# EAGLE board LCDShieldC144MVGI v1 (EAGLE 5.11)
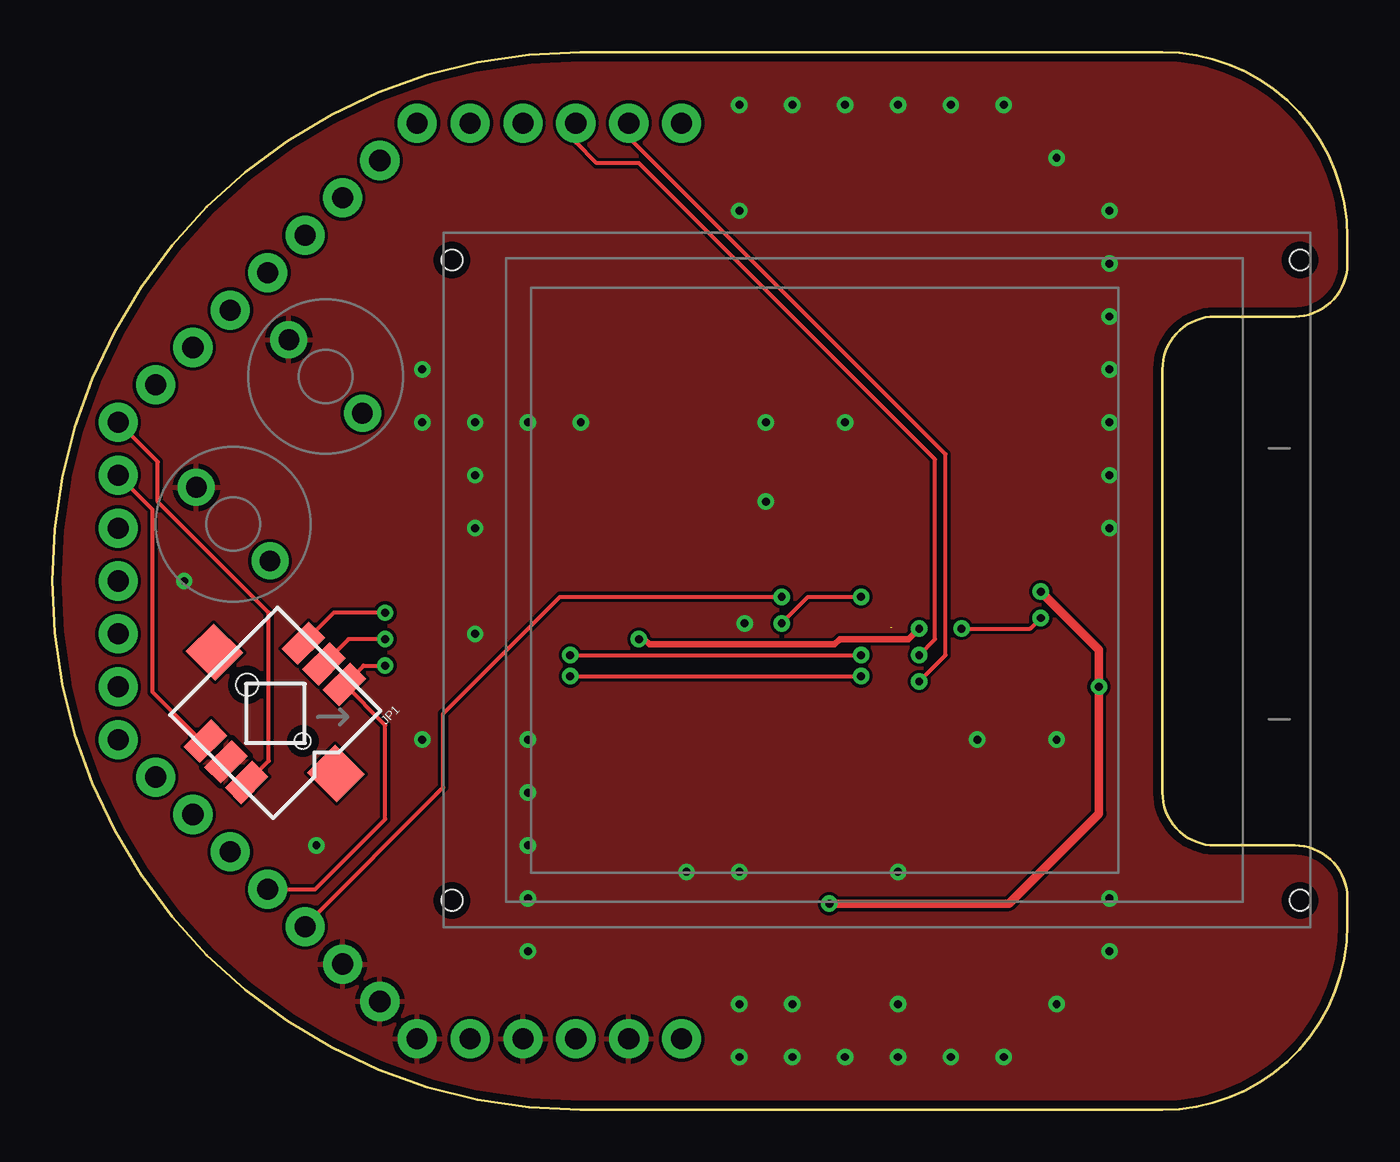
[diagram p0: board, top side]
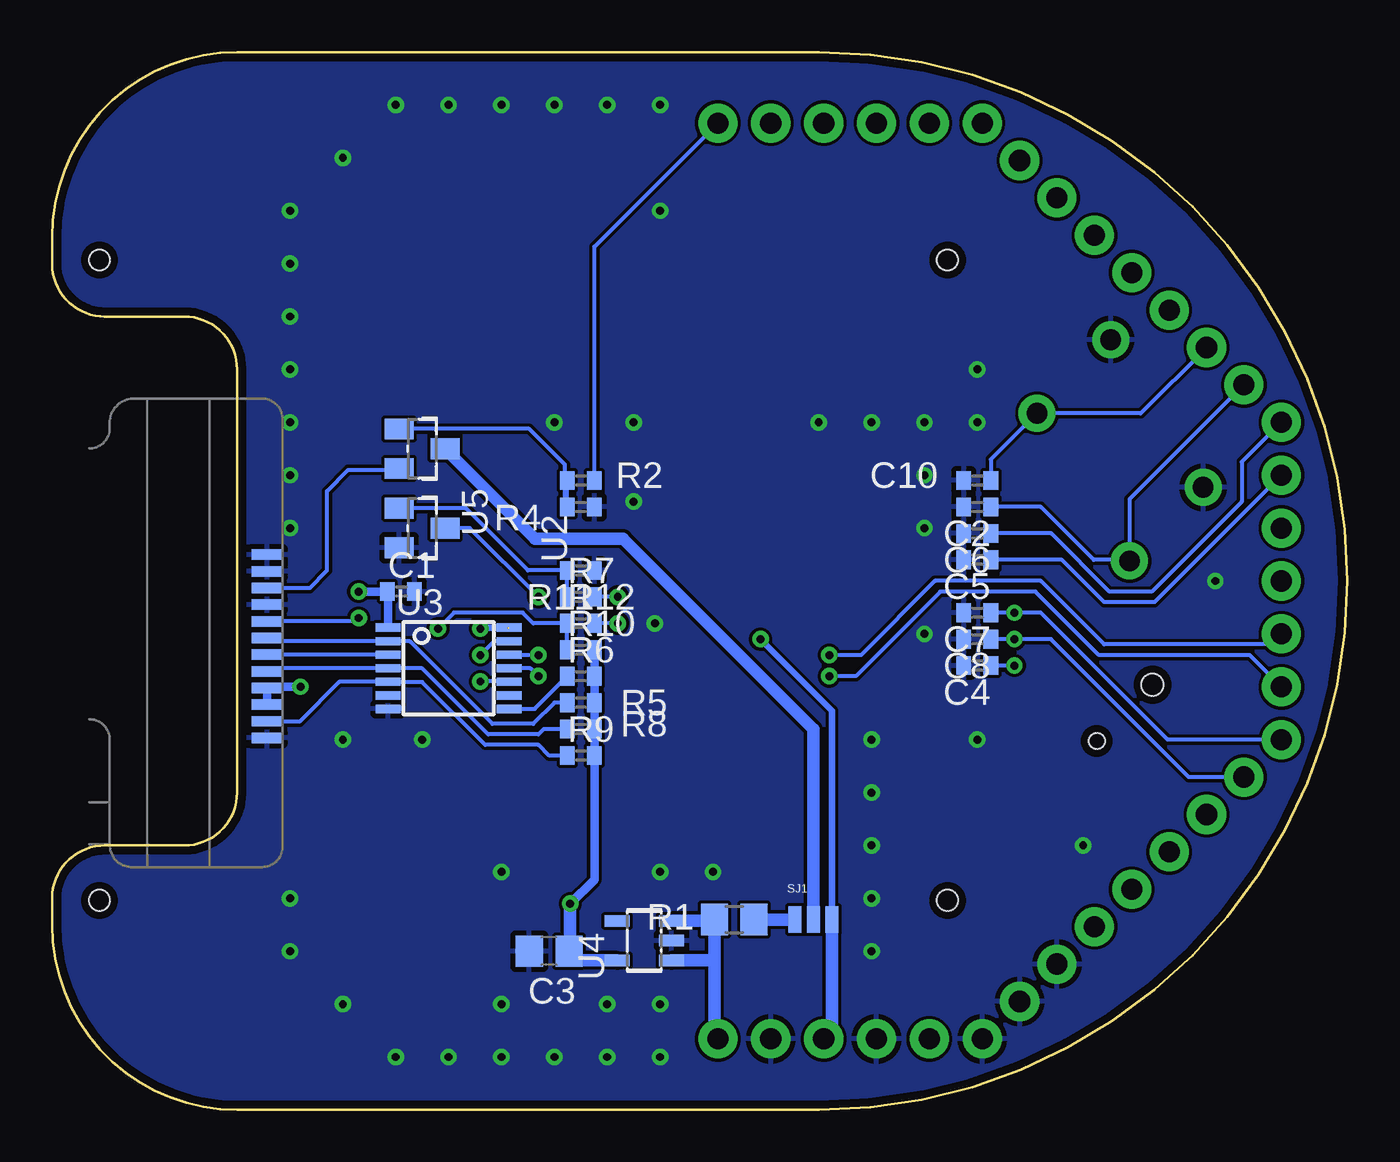
[diagram p1: board, bottom side, seen from below]

Size 62.23 x 50.8 mm. Coordinates in mm from the lower left corner, seen from the top.
Copper layers (1*16): Top 0.035mm / dielectric 1.5mm / Bottom 0.035mm
Design rules "PDX (Production)": minimum track width 6mil, minimum drill 15mil, track to track 6mil, track to pad 6mil, pad to pad 4mil, via to via 6mil, smd to smd 4mil, copper to edge 15mil, drill to drill 6mil, minimum pad ring 10mil, minimum via ring 8mil, stop-mask expansion 4mil, vias tented up to drill 25mil, thermal gap 10mil

## Footprints (pad centres in the part's own frame; a part is rotated, then mirrored left to right if it is on the bottom)
C0402 = smd 0.7 x 0.9: 1 -0.65,0; 2 0.65,0
C0805 = smd 1.3 x 1.5: 1 -0.95,0; 2 0.95,0
JOYSTICK_MINI = smd 1.85 x 1.1: A 0,2.8; B 6.65,2.8; C 0,0; CTR 0,1.4; D 6.65,0; GND 6.65,1.4 | smd 1.9 x 2: NC 3.325,5.53; NC@0 3.33,-2.72 | hole 0.75: 3.34,3.295 | hole 1.05: 3.325,-0.5
#NEBULA-PTH = drill 1.016 pad 1.88 round: 3.3V -25.637,-47.388; 5V -30.716,-47.388; A0 -36.848,-7.004; A1 -38.645,-8.8; A2 -40.44,-10.596; A3 -42.237,-12.392; A4 -47.625,-22.86; A5 -47.625,-25.4; A6 -40.44,-40.204; A7 -38.645,-42; BAT -20.557,-47.388; COM1_RX -25.636,-3.412; COM1_TX -23.096,-3.412; COM2_RX -47.625,-30.48; COM2_TX -47.625,-27.94; D0 -47.625,-20.32; D1 -47.625,-17.78; D2 -45.829,-15.984; D3 -44.032,-14.188; DAC1 -47.625,-33.02; DAC2 -45.829,-34.816; GND1 -36.848,-43.796; GND2 -35.052,-45.592; GND3 -33.256,-47.388; GND4 -28.177,-47.388; GND5 -23.097,-47.388; MCO -20.556,-3.412; T0 -28.176,-3.412; T1 -30.716,-3.412; T2 -33.256,-3.412; T3 -35.052,-5.208; TA0 -44.032,-36.612; TA1 -42.237,-38.408
R0805 = smd 1.3 x 1.5: 1 -0.95,0; 2 0.95,0
R0402 = smd 0.7 x 0.9: 1 -0.65,0; 2 0.65,0
SJ_3_PASTE1&2 = smd 0.635 x 1.27: 1 -0.889,0; 2 0,0; 3 0.889,0
VARITRONIX_COG-C144MVGI-08_FOLDED = smd 0.5 x 1.5 bottom: P1 17.9,8.55; P2 17.1,8.55; P3 16.3,8.55; P4 15.5,8.55; P5 14.7,8.55; P6 13.9,8.55; P7 13.1,8.55; P8 12.3,8.55; P9 11.5,8.55; P10 10.7,8.55; P11 9.9,8.55; P12 9.1,8.55 | hole 1: 1.3,0.5; 32.05,41.24; 1.3,41.24; 32.05,0.5
DUBLIB_SOT23 = smd 1 x 1.4: 1 -0.95,-1.1; 2 0.95,-1.1; 3 0,1.1
PW_R-PDSO-G14 = smd 0.4 x 1.2: 1 -1.95,-2.9; 2 -1.3,-2.9; 3 -0.65,-2.9; 4 0,-2.9; 5 0.65,-2.9; 6 1.3,-2.9; 7 1.95,-2.9; 8 1.95,2.9; 9 1.3,2.9; 10 0.65,2.9; 11 0,2.9; 12 -0.65,2.9; 13 -1.3,2.9; 14 -1.95,2.9
SOT23-5L = smd 0.55 x 1.2: 1 -0.95,-1.3; 2 0,-1.3; 3 0.95,-1.3; 4 0.95,1.3; 5 -0.95,1.3
SWITCH-2P-5MM = drill 1 pad 1.778 round: P1 0,0; P2 5,0

## Placement (x,y rotation side)
BOARDOUTLINE  #NEBULA-VARITRONIX-OUTLINE  [#NEBULA-VARITRONIX-OUTLINE]  -2.54,-2.54 0 top
C1  0.1uF  [C0402]  45.47,24.89 0 bottom
C2  220pF  [C0402]  17.78,28.96 180 bottom
C3  10uF  [C0805]  38.35,7.62 180 bottom
C4  220pF  [C0402]  17.78,21.34 180 bottom
C5  220pF  [C0402]  17.78,26.42 180 bottom
C6  220pF  [C0402]  17.78,27.69 180 bottom
C7  220pF  [C0402]  17.78,23.88 180 bottom
C8  220pF  [C0402]  17.78,22.61 180 bottom
C10  220pF  [C0402]  17.78,30.23 180 bottom
INFO3  Warren D Greenway and Evan Teitelman  [%CC-NC-SA]  -2.54,-10.16 0 top  (outside the outline)
JP1  JOYSTICK_MINI4UCON  [JOYSTICK_MINI]  12.07,22.41 225 top
LOGO1  #PYGMYLOGOLARGE  [#PYGMYLOGO]  27.94,25.4 0 bottom
NEBULA1  #NEBULAPTH  [#NEBULA-PTH]  50.8,50.8 0 top
R1  10  [R0805]  29.46,9.14 0 bottom
R2  10K  [R0402]  36.83,30.23 180 bottom
R4  47K  [R0402]  36.83,28.96 180 bottom
R5  47K  [R0402]  36.83,19.56 0 bottom
R6  47K  [R0402]  36.83,20.83 0 bottom
R7  10K  [R0402]  36.83,24.64 0 bottom
R8  47K  [R0402]  36.83,18.29 0 bottom
R9  47K  [R0402]  36.83,17.02 0 bottom
R10  47K  [R0402]  36.83,22.1 0 bottom
R11  47K  [R0402]  36.83,25.91 180 bottom
R12  470  [R0402]  36.83,23.37 0 bottom
SJ1  [SJ_3_PASTE1&2]  25.65,9.14 0 bottom
U1  VARITRONIX_COG-C144MVGI-08FOLDED  [VARITRONIX_COG-C144MVGI-08_FOLDED]  60.45,8.76 90 top
U2  BIPOLAR-PMBT6428  [DUBLIB_SOT23]  44.45,31.75 270 bottom
U3  INTERFACE-TXS0104E  [PW_R-PDSO-G14]  43.18,21.21 270 bottom
U4  NCP500  [SOT23-5L]  33.78,8.13 90 bottom
U5  BIPOLAR-PMBT6428  [DUBLIB_SOT23]  44.45,27.94 270 bottom
U6  SWITCH-ALPS-SKRG  [SWITCH-2P-5MM]  6.93,29.9 315 top
U7  SWITCH-ALPS-SKRG  [SWITCH-2P-5MM]  14.91,33.45 135 top

## Library data of the parts
BOARDOUTLINE INFO3 NEBULA1 = PygmyBoards
C1-C8 C10 R1 R2 R4-R12 = rcl
JP1 = SparkFun
LOGO1 SJ1 U1-U7 = Pygmy

## Nets
2.8V: C1.1 C3.1 R5.2 R6.2 R8.2 R9.2 R10.2 U1.P9 U1.P10 U3.1 U4.5
3.3V: NEBULA1.3.3V SJ1.3 U3.14
A0: NEBULA1.COM1_RX U3.13
BAT: NEBULA1.BAT R1.1 U4.1 U4.3
BL: NEBULA1.MCO R2.1
BUTTON1: C10.1 NEBULA1.D3 U7.P1
BUTTON2: C2.1 NEBULA1.D2 U6.P2
CENTER: C8.1 JP1.CTR NEBULA1.DAC2
CS: NEBULA1.COM1_TX U3.10
DOWN: C5.1 JP1.D NEBULA1.D0
GND: C1.2 C2.2 C3.2 C4.2 C5.2 C6.2 C7.2 C8.2 C10.2 JP1.GND NEBULA1.GND1 NEBULA1.GND2 NEBULA1.GND3 NEBULA1.GND4 NEBULA1.GND5 R4.1 R11.1 U1.P1 U1.P2 U1.P4 U1.P12 U3.7 U4.2 U5.2 U6.P1 U7.P2
LCD_A0: R5.1 U1.P6 U3.2
LCD_CS: R9.1 U1.P11 U3.5
LCD_SCK: R8.1 U1.P8 U3.4
LCD_SDA: U1.P7 U3.3
LEFT: C6.1 JP1.B NEBULA1.D1
N$1: SJ1.2 U2.3
N$2: R1.2 SJ1.1
N$3: R6.1 U3.8
N$4: R7.1 R11.2 U5.1
N$5: R12.2 U5.3
N$6: U1.P3 U2.2
N$7: R2.2 R4.2 U2.1
N$9: R10.1 R12.1 U1.P5
RIGHT: C7.1 JP1.C NEBULA1.DAC1
RST: NEBULA1.A7 R7.2
SCK: NEBULA1.COM2_RX U3.11
SDAT: NEBULA1.COM2_TX U3.12
UP: C4.1 JP1.A NEBULA1.A6

## Tracks (layer width: path | path; a pad name or v marks a point on that pad's centre or on a via)
2.8V  (via drill 0.38)
  Top 0.406: v37.34,9.91 45.97,9.91 50.29,14.22 v50.29,20.32 50.29,22.1 v47.5,24.89
  Bottom 0.203: C1.1 46.08,24.86
  Bottom 0.406: 46.08,24.86 U3.1 | v37.34,9.91 36.18,11.06 R9.2 R8.2 R5.2 R6.2 R10.2 | v50.29,20.32 51.84,20.32 U1.P9 U1.P10 | v47.5,24.89 C1.1
  Bottom 0.61: U4.5 36.96,7.18 C3.1 37.34,7.69 v37.34,9.91
3.3V  (via drill 0.38)  (1 unrouted)
  Top 0.305: v28.19,22.61 28.45,22.61 28.7,22.35 37.59,22.35 37.85,22.61 41.15,22.61 v41.66,23.11
  Bottom 0.305: SJ1.3 24.77,19.18 v28.19,22.61 | 40.34,23.16 41.61,23.16 v41.66,23.11
  Bottom 0.61: SJ1.3 24.77,3.81 NEBULA1.3.3V
A0  (via drill 0.38)
  Top 0.203: NEBULA1.COM1_RX 25.16,46.46 26.16,45.47 28.19,45.47 42.42,31.24 42.42,22.61 v41.66,21.84
  Bottom 0.203: v41.66,21.84 41,22.5 U3.13
BAT
  Bottom 0.61: 30.41,7.11 30.41,3.11 30.48,3.05 30.48,3.17 NEBULA1.BAT | 30.41,7.11 R1.1 30.48,9.08 U4.3 | U4.1 30.48,7.18 30.41,7.11
BL
  Bottom 0.203: R2.1 36.18,41.45 NEBULA1.MCO
BUTTON1
  Bottom 0.203: NEBULA1.D3 9.93,33.45 U7.P1 17.13,31.23 C10.1
BUTTON2
  Bottom 0.203: NEBULA1.D2 10.47,29.32 U6.P2 10.52,26.42 12.19,26.42 14.73,28.96 C2.1
CENTER  (via drill 0.38)
  Top 0.203: v16,22.61 14.25,22.61 JP1.CTR
  Bottom 0.203: C8.1 v16,22.61 14.25,22.61 7.62,15.98 NEBULA1.DAC2
CS  (via drill 0.38)
  Top 0.203: NEBULA1.COM1_TX 27.7,46.72 42.93,31.5 42.93,21.84 v41.66,20.57
  Bottom 0.203: v41.66,20.57 40.3,20.57 U3.10
DOWN
  Top 0.203: JP1.D 7.18,17.71 4.83,20.07 4.83,28.83 NEBULA1.D0
  Bottom 0.203: C5.1 13.72,26.42 11.68,24.38 9.27,24.38 NEBULA1.D0
GND  (via drill 0.38)
  other vias: 33.02,11.43 33.27,23.37 40.64,11.43 34.29,33.02 25.4,33.02 50.8,30.48 30.48,11.43 22.86,12.7 35.56,2.54 38.1,2.54 40.64,2.54 17.78,17.78 20.32,22.86 45.72,2.54 33.02,48.26 35.56,48.26 38.1,48.26 40.64,48.26 43.18,48.26 45.72,48.26 48.26,45.72 50.8,43.18 50.8,35.56 50.8,38.1 38.1,33.02 12.7,12.7 33.02,5.08 44.45,17.78 50.8,10.16 48.26,17.78 48.26,5.08 50.8,7.62 6.35,25.4 33.02,2.54 40.64,5.08 22.86,10.16 43.18,2.54 35.56,5.08 22.86,7.62 20.32,33.02 50.8,27.94 17.78,35.56 22.86,17.78 33.02,43.18 22.86,33.02 50.8,40.64 20.32,30.48 17.78,33.02 34.29,29.21 50.8,33.02 20.32,27.94 22.86,15.24
  pour Bottom: -2.54,53.34 67.31,53.34 67.31,-2.54 -2.54,-2.54
  pour Top: -1.27,52.07 66.04,52.07 66.04,-1.27 -1.27,-1.27
LCD_A0
  Bottom 0.203: U1.P6 51.75,22.51 U3.2 45.03,22.5 41.07,18.54 39.12,18.54 38.1,19.56 R5.1
LCD_CS
  Bottom 0.203: U1.P11 51.88,18.64 50.34,18.64 48.43,20.56 U3.5 46.07,20.55 44.45,20.55 41.43,17.53 38.86,17.53 38.35,17.02 R9.1
LCD_SCK
  Bottom 0.203: U1.P8 51.76,21.21 U3.4 44.45,21.21 41.27,18.03 38.86,18.03 38.61,18.29 R8.1
LCD_SDA
  Bottom 0.203: U3.3 U1.P7
LEFT
  Top 0.203: JP1.B 9.38,15.73 10.41,16.76 10.41,23.88 5.08,29.21 5.08,31.12 NEBULA1.D1
  Bottom 0.203: C6.1 14.22,27.69 11.43,24.89 9.4,24.89 5.08,29.21 5.08,31.12 NEBULA1.D1
N$1
  Bottom 0.61: SJ1.2 25.65,18.29 34.8,27.43 39.03,27.43 U2.3
N$2
  Bottom 0.61: SJ1.1 R1.2
N$3
  Bottom 0.203: U3.8 39.05,19.26 R6.1
N$4
  Bottom 0.203: U5.1 42.35,28.89 39.37,25.91 R11.2 R7.1
N$5  (via drill 0.38)
  Top 0.203: v35.05,23.37 36.32,24.64 v38.86,24.64
  Bottom 0.203: v35.05,23.37 R12.2 | U5.3 42.16,27.94 v38.86,24.64
N$6
  Bottom 0.203: U1.P3 49.87,25.06 49.02,25.91 49.02,29.72 48.01,30.73 45.62,30.73 U2.2
N$7
  Bottom 0.203: U2.1 39.3,32.7 37.59,30.99 37.59,29.07 R4.2 R2.2
N$9  (via drill 0.38)
  Top 0.203: v43.69,23.11 46.99,23.11 v47.5,23.62
  Bottom 0.203: R10.1 R12.1 39.12,23.37 39.62,23.88 42.93,23.88 v43.69,23.11 | U1.P5 47.66,23.46 v47.5,23.62
RIGHT  (via drill 0.38)
  Top 0.203: v16,23.88 13.54,23.88 JP1.C
  Bottom 0.203: C7.1 v16,23.88 14.73,23.88 8.64,17.78 NEBULA1.DAC1
RST  (via drill 0.38)
  Top 0.203: v35.05,24.64 24.4,24.64 18.8,19.03 18.8,15.49 12.16,8.85 NEBULA1.A7
  Bottom 0.203: v35.05,24.64 R7.2
SCK  (via drill 0.38)
  Top 0.203: v24.89,20.83 v38.86,20.83
  Bottom 0.203: U3.11 39.24,21.21 v38.86,20.83 | v24.89,20.83 23.62,20.83 19.56,24.89 14.99,24.89 11.94,21.84 4.7,21.84 NEBULA1.COM2_RX
SDAT  (via drill 0.38)
  Top 0.203: v24.89,21.84 v38.86,21.84
  Bottom 0.203: v38.86,21.84 40.27,21.84 U3.12 | v24.89,21.84 23.37,21.84 19.81,25.4 14.73,25.4 11.68,22.35 3.68,22.35 NEBULA1.COM2_TX
UP  (via drill 0.38)
  Top 0.203: NEBULA1.A6 12.63,10.6 16,13.97 16,18.48 JP1.A 14.96,21.34 v16,21.34
  Bottom 0.203: v16,21.34 C4.1

## Text on the board
bTest: Pygmy Nebula SPI LCD Shield V1.0 | Design By: Warren D Grreenway | And Evan Teitelman | For use with Varitronix COG-C144MVGI-08
Document: Pygmy LCD Shield | Version 1.0 | Standard Grid: 50mil | Routing Grids: 8mil / 4mil